# Altium PCB pump_oil_pcb.PcbDoc
Units mil, origin at the board's own origin, x right, y up, seen from the top; angles counter-clockwise.
Board outline 1771.65 x 2165.35 mil, 2 copper layers (Top Layer, Bottom Layer); 50 components, 31 nets, 191 pads, 73 vias.
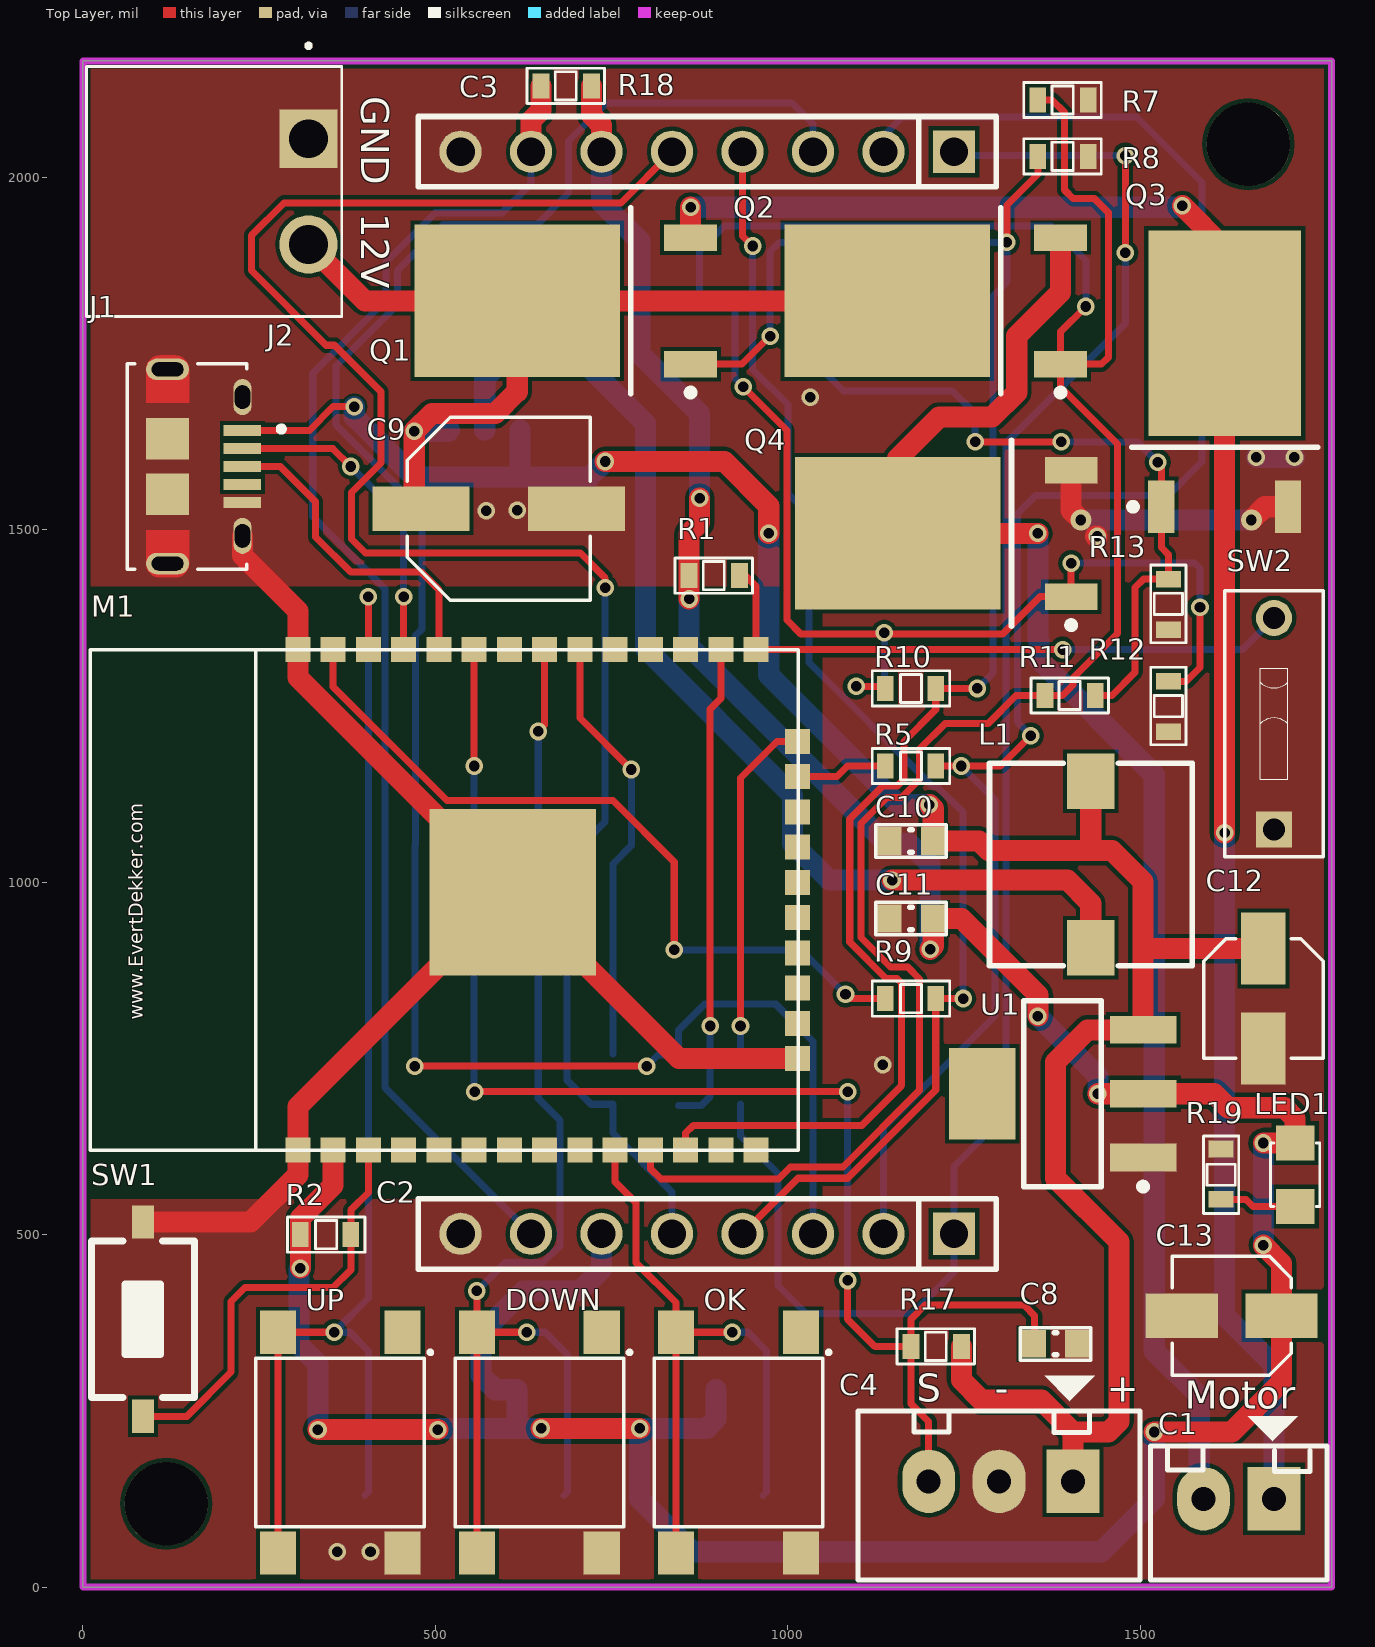
[diagram p0: Top Layer view]
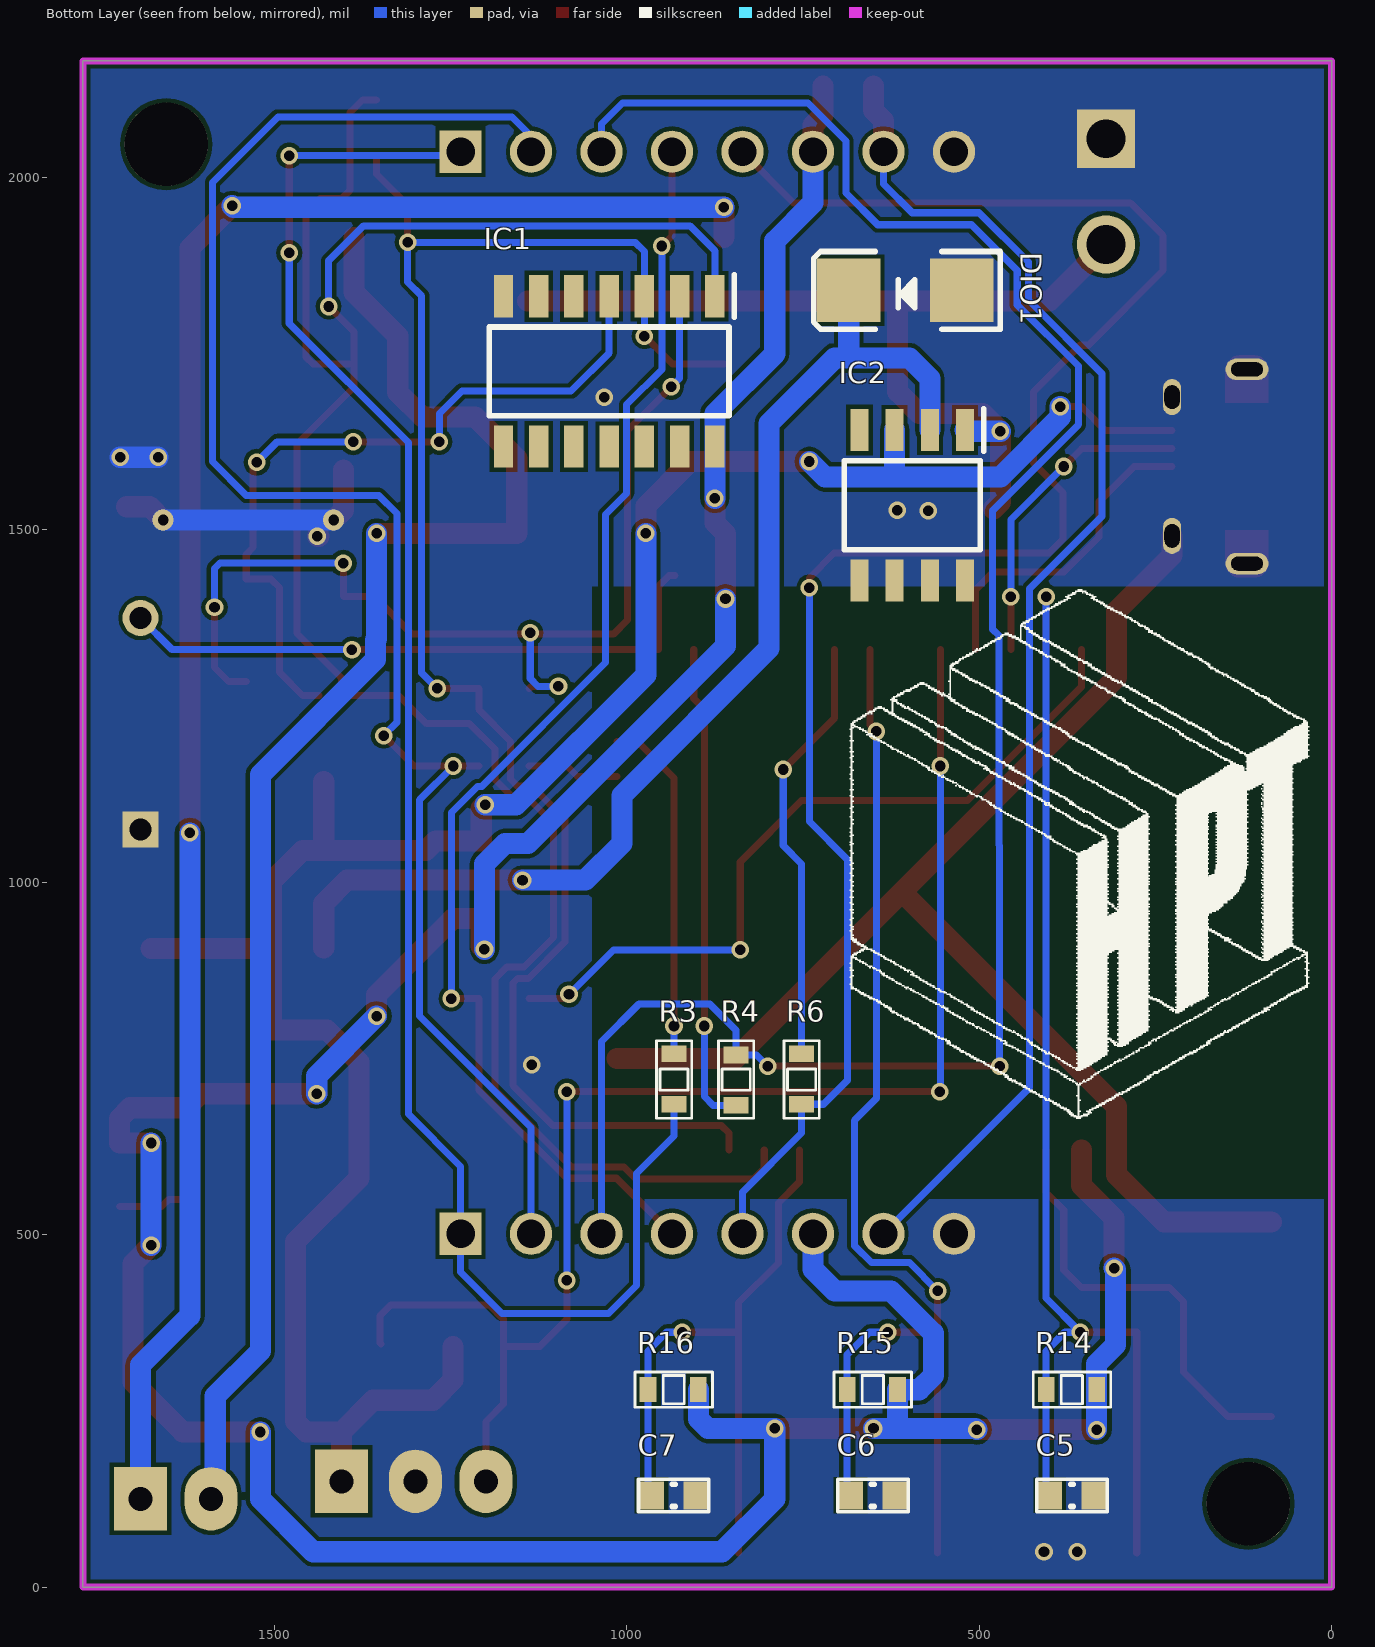
[diagram p1: Bottom Layer view, seen from below]
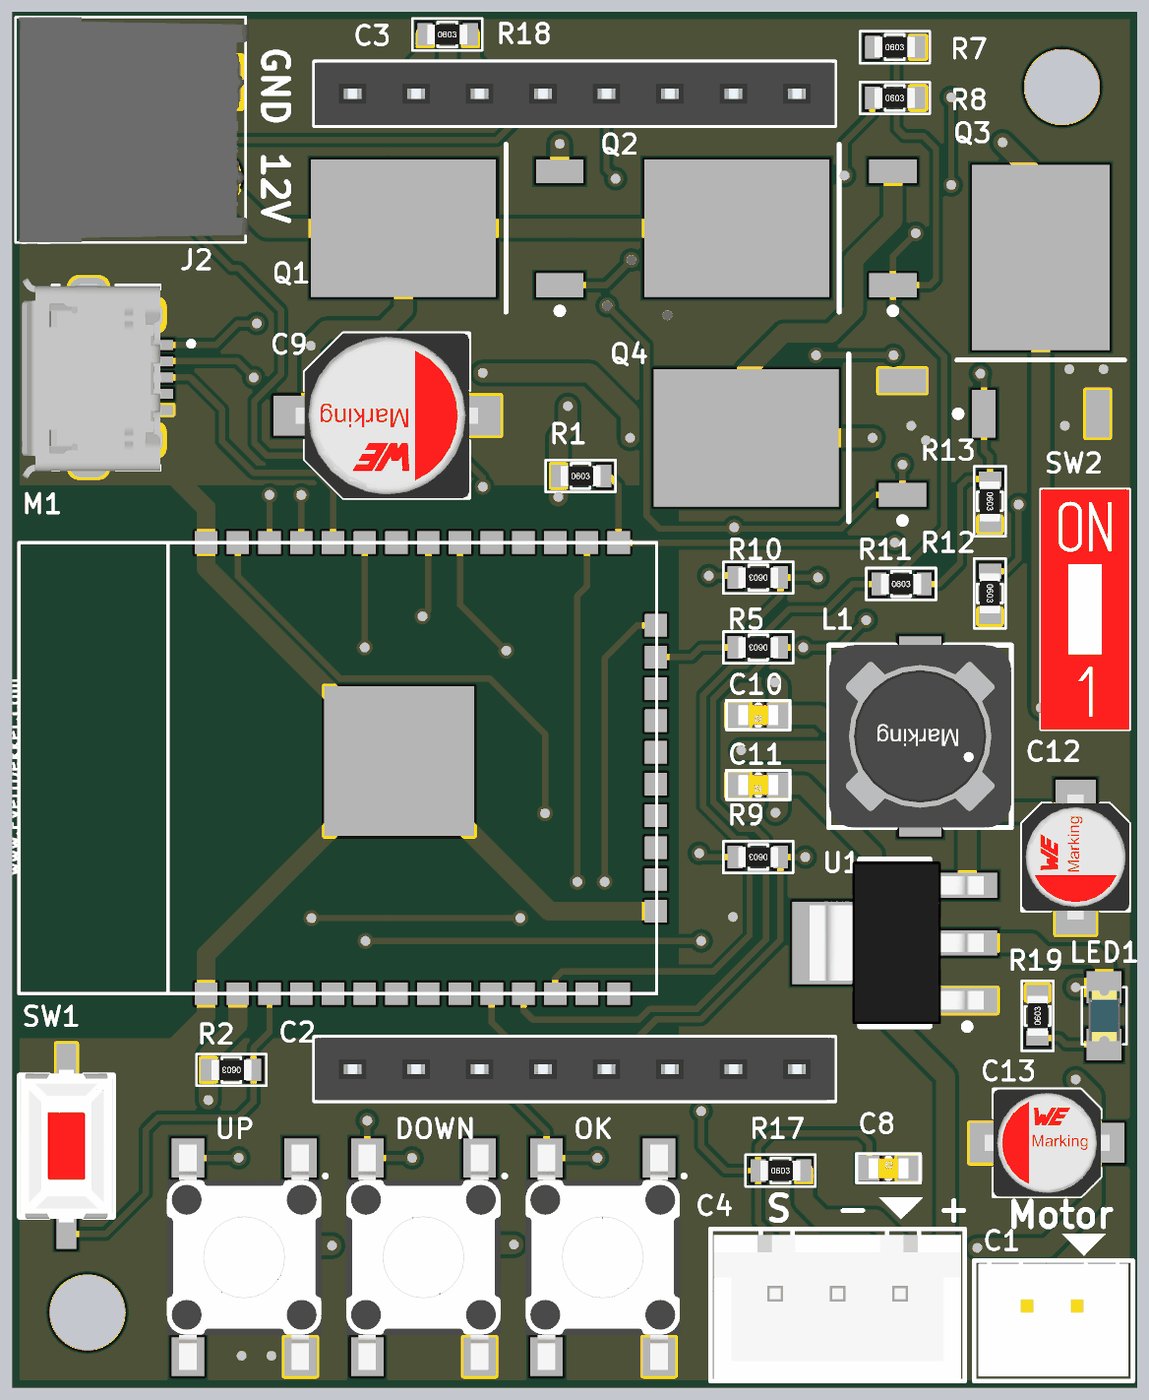
[diagram p2: 3D render of the assembled board from above, using the file's embedded part models]
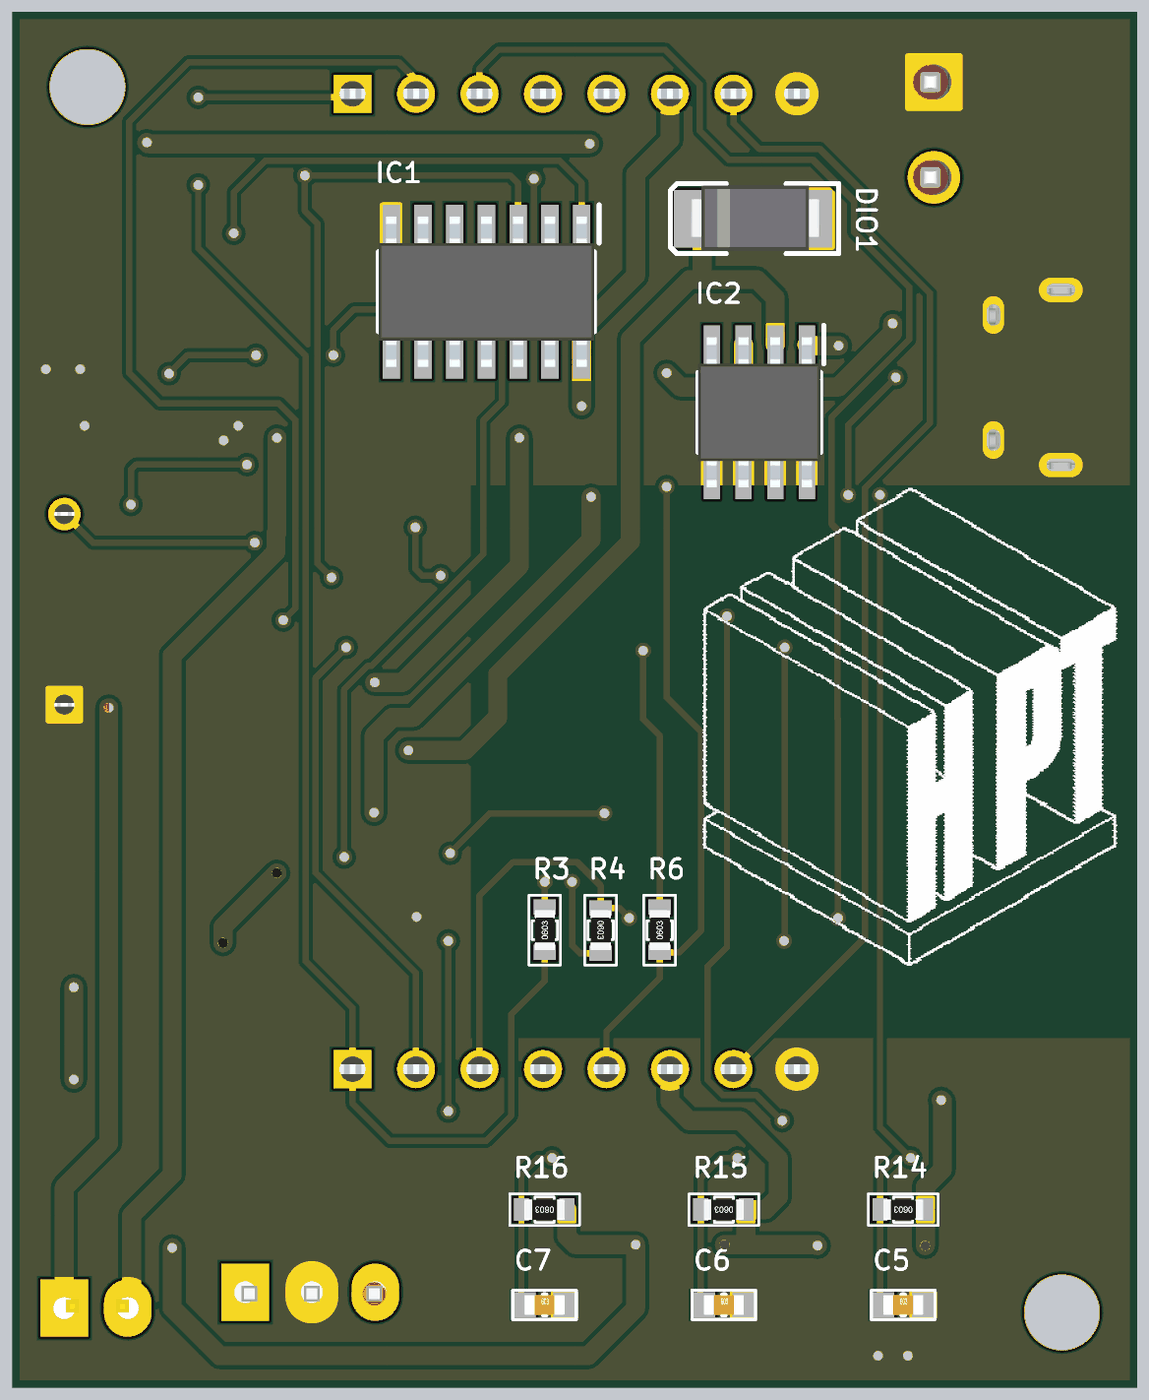
[diagram p3: 3D render of the assembled board from below, using the file's embedded part models]

## Layer stack, top to bottom
Top Solder: solder mask 0.4, Solder Resist, Dk 3.5
Top Layer: signal copper 1.4
Dielectric 1: dielectric 12.6, FR-4, Dk 4.8
Bottom Layer: signal copper 1.4
Bottom Solder: solder mask 0.4, Solder Resist, Dk 3.5

## Board outline
0,0 1771.65,0 1771.65,2165.35 0,2165.35

## Design rules (kind name [scope] priority, off if disabled: settings)
Clearance [All] p1: gap=6
PlaneConnect [All] p1: planeconnectstyle=Direct reliefexpansion=20 reliefentries=4 reliefconductorwidth=10 reliefairgap=10
PolygonConnect [All] p1: connectstyle=Direct reliefconductorwidth=10 reliefentries=4 polygonreliefangle="90 Angle" airgapwidth=10
RoomDefinition pump_oil_schematic [InComponentClass('pump_oil_schematic')] p1: confinementstyle=ConfineIn formatcopy=TRUE lockcomponents=FALSE outline 2025,30 14170,30 14170,1175 2025,1175
RoutingVias [All] p1: holewidth=15 width=25 viastyle="Through Hole" minholewidth=15 minwidth=25 maxholewidth=28 maxwidth=50
SolderMaskExpansion [All] p1: expansion=4
Width [All] p1: maxlimit=50 minlimit=10 preferedwidth=10
29 further rules are at their usual default settings.

## Components (designator, comment, footprint, x,y, rotation, side; value= is the part's Value field where it differs from the comment)
C1 "Header2" Header2 1690,125 r180 top
C2 "JP8" JP8-C1T 1235.83,501.18 r180 top locked
C3 "JP8" JP8-C1T 1235.83,2036.61 r180 top locked
C4 "Header3" Header3 1400,150 r180 top
C5 "10uF" CN-SMD-0603 368.4,130 r180 bottom
C6 "10uF" CN-SMD-0603 650.9,130 r180 bottom
C7 "10uF" CN-SMD-0603 933.4,130 r180 bottom
C8 "10uF" CN-SMD-0603 1380,345 r0 top
C9 "470uF" CAP-ALU-SMD-6.3x7.7x2.2 590,1530 r0 top
C10 "10uF" CN-SMD-0603 1175,1058.54 r180 top
C11 "10uF" CN-SMD-0603 1175,948.54 r180 top
C12 "CN-ALU-SMD" CAP-ALU-SMD-4.5x5x1.4 1675,835 r270 top
C13 "CN-ALU-SMD" CAP-ALU-SMD-4.5x5x1.4 1630,385 r180 top
DIO1 "SS34" DIO-SMD-106 605,1840 r180 bottom
DOWN "SW" SW2-SMD 647.5,205 r270 top (schematic designator SW4)
IC1 "74HC14S14-13" SOIC127P600X173-14N 1025,1725 r270 bottom
IC2 "XL1509-5.0E1" SOIC127P600X175-8N 595,1535 r270 bottom
J1 "10118194-0001LF" AMPHENOL_10118194-0001LF 120,1590 r270 top
J2 "1782572" 1782572 320,2055 r270 top
L1 "1.0 μH" L-SMD-M-7.3x4.5 1430,1025 r0 top
LED1 "LED" LED-0805-Blue 1720,630 r270 top
M1 "ESP32S_Module" ESP32S 1015,620 r90 top
OK "SW" SW2-SMD 930,205 r270 top (schematic designator SW5)
Q1 "IRFR320" TO-252AA_N 685,1825 r180 top
Q2 "IRFR320" TO-252AA_N 1210,1825 r180 top
Q3 "IRFR320" TO-252AA_N 1620,1710 r90 top
Q4 "IRFR320" TO-252AA_N 1225,1495 r180 top
R1 "10K" RES-SMD-0603 895,1435 r0 top
R2 "10K" RES-SMD-0603 345,500 r180 top
R3 "10K" RES-SMD-0603 933,720.01 r90 bottom
R4 "10K" RES-SMD-0603 845,720 r270 bottom
R5 "10K" RES-SMD-0603 1175,1165 r180 top
R6 "10K" RES-SMD-0603 752,720.01 r90 bottom
R7 "10K" RES-SMD-0603 1390,2110 r0 top
R8 "10K" RES-SMD-0603 1390,2030 r0 top
R9 "10K" RES-SMD-0603 1175,835 r180 top
R10 "DNI" RES-SMD-0603 1175,1275 r180 top
R11 "DNI" RES-SMD-0603 1400,1265 r0 top
R12 "10K" RES-SMD-0603 1540,1250 r270 top
R13 "10K" RES-SMD-0603 1540,1395 r270 top
R14 "10K" RES-SMD-0603 368.4,280 r0 bottom
R15 "10K" RES-SMD-0603 650.9,280 r0 bottom
R16 "10K" RES-SMD-0603 933.4,280 r0 bottom
R17 "10K" RES-SMD-0603 1210,341.46 r0 top
R18 "10K" RES-SMD-0603 685,2130 r0 top
R19 "1K" RES-SMD-0603 1615,585 r90 top
SW1 "Reset" SW1-SMD 85,380 r90 top
SW2 "Flash" SW-DIP1-1 1690,1225 r0 top
U1 "LM1117-3.3V" SOT223 1390,700 r90 top
UP "SW" SW2-SMD 365,205 r270 top (schematic designator SW3)

## Footprints (in the part's own frame and the unit in brackets; to place one, negate y for a bottom-side part, rotate by r counter-clockwise, add the part's x,y. Pads: shape width x height; smd on the part's side, far side on the other; paste and mask are expansions set on the pad)
1782572 [mm]
  rect 2.1x2.1 hole 1.4: 1(0,0)
  round 2.1 hole 1.4: 2(3.81,0)
  silkscreen extent -3.4,-8 6.41,1.2, body extent -2.6,-7.86 6.41,1.34, height 6.9
AMPHENOL_10118194-0001LF [mm]
  rect 0.4x1.35 smd: 1(-1.3,2.7) 2(-0.65,2.7) 3(0,2.7) 4(0.65,2.7) 5(1.3,2.7)
  oval 1.3x0.65 hole 0.55 slot 0.85 at 0 deg: S1(-2.5,2.7) S2(2.5,2.7)
  oval 0.775x1.55 hole 0.5 slot 1.15 at 90 deg: S3(-3.5,0) S6(3.5,0)
  rect 1.5x1.55 smd: S4(-1,0) S5(1,0)
  Top Layer region: 193 vertices and 0 holes, not listed, extent -4,-0.775 -2.3,0.78
  Top Layer region: 193 vertices and 0 holes, not listed, extent 2.3,-0.78 4,0.775
  silkscreen extent -3.7,-1.45 3.7,4.2, body extent -3.99,-2.67 4.06,2.91, height 3.12
CAP-ALU-SMD-4.5x5x1.4 [mm]
  rect 2.6x1.6 smd: 1(-1.8,0) 2(1.8,0)
  silkscreen extent -2.15,-2.15 2.15,2.15, body extent -2.5,-2.15 2.5,2.15, height 5.45
CAP-ALU-SMD-6.3x7.7x2.2 [mm]
  rect 3.5x1.6 smd: 1(-2.8,0) 2(2.8,0)
  silkscreen extent -3.3,-3.3 3.3,3.3, body extent -3.65,-3.3 3.65,3.3, height 7.65
CN-SMD-0603 [mm]
  rect 0.9x1 smd: 1(-0.8,0) 2(0.8,0)
  silkscreen extent -1.27,-0.58 1.27,0.58, body extent -0.8,-0.4 0.8,0.4, height 0.3
DIO-SMD-106 [mil]
  rect 90x90.55 smd: 1(80,0) 2(-80,0)
  silkscreen extent -130,-55 135,55, body extent -99,-50 106,52, height 95
ESP32S [mm] "ESP32S-Module"
  rect 0.9x0.9 smd: 1(0,18.034) 2(0,16.764) 3(0,15.494) 4(0,14.224) 5(0,12.954) 6(0,11.684) 7(0,10.414) 8(0,9.144) 9(0,7.874) 10(0,6.604) 11(0,5.334) 12(0,4.064) 13(0,2.794) 14(0,1.524) 15(3.3,0.034) 16(4.57,0.034) 17(5.84,0.034) 18(7.11,0.034) 19(8.38,0.034) 20(9.65,0.034) 21(10.92,0.034) 22(12.19,0.034) 23(13.46,0.034) 24(14.73,0.034) 25(18.034,1.524) 26(18.034,2.794) 27(18.034,4.064) 28(18.034,5.334) 29(18.034,6.604) 30(18.034,7.874) 31(18.034,9.144) 32(18.034,10.414) 33(18.034,11.684) 34(18.034,12.954) 35(18.034,14.224) 36(18.034,15.494) 37(18.034,16.764) 38(18.034,18.034)
  rect 6x6 smd: 101(9.3,10.3)
  silkscreen extent 0,0 18.03,25.53, body extent 0,0 18.03,25.53, height 2
Header2 [mil] "CON2"
  rect 75x90 hole 34: 1(0,0)
  oval 75x90 hole 34: 2(100,0)
  silkscreen extent -75,-118 175,115, body extent -68,-70 168,107, height 236
Header3 [mil] "CON 3"
  rect 75x90 hole 34: 1(-5,0)
  oval 75x90 hole 34: 2(100,0) 3(200,0)
  silkscreen extent -100,-150 300,140, body extent -95,-90 295,136, height 276
JP8-C1T [mm] "8 row, straight, gold plating"
  rect 1.52x1.52 hole 1.02: 1(0,0)
  round 1.52 hole 1.02: 2(2.54,0) 3(5.08,0) 4(7.62,0) 5(10.16,0) 6(12.7,0) 7(15.24,0) 8(17.78,0)
  silkscreen extent -1.52,-1.27 19.3,1.27, body extent -1.52,-1.25 19.3,1.25, height 8.51
L-SMD-M-7.3x4.5 [mm] "WE-PDA SMD Shielded Power Inductor, 7345"
  rect 1.7x2 smd: 1(0,3) 2(0,-3)
  silkscreen extent -3.65,-3.65 3.65,3.65, body extent -3.65,-3.65 3.65,3.65, height 4.05
LED-0805-Blue [mil]
  rect 50x55 smd: 1(0,0) 2(90,0)
  silkscreen extent 0,-35 90,35, body extent 5,-25 85,25, height 43
RES-SMD-0603 [mm]
  rect 0.6x0.9 smd: 1(-0.889,0) 2(0.927,0)
  silkscreen extent -1.4,-0.64 1.4,0.64, body extent -0.8,-0.4 0.8,0.4, height 0.43
SOIC127P600X173-14N [mm]
  rect 1.528x0.7 smd: 1(-2.711,3.81) 2(-2.711,2.54) 3(-2.711,1.27) 4(-2.711,0) 5(-2.711,-1.27) 6(-2.711,-2.54) 7(-2.711,-3.81) 8(2.711,-3.81) 9(2.711,-2.54) 10(2.711,-1.27) 11(2.711,0) 12(2.711,1.27) 13(2.711,2.54) 14(2.711,3.81)
  silkscreen extent -3.47,-4.32 1.6,4.51, body extent -3,-4.32 3,4.32, height 1.73
SOIC127P600X175-8N [mm]
  rect 1.525x0.65 smd: 1(-2.712,1.905) 2(-2.712,0.635) 3(-2.712,-0.635) 4(-2.712,-1.905) 5(2.712,-1.905) 6(2.712,-0.635) 7(2.712,0.635) 8(2.712,1.905)
  silkscreen extent -3.47,-2.45 1.6,2.58, body extent -3,-2.45 3,2.45, height 1.75
SOT223 [mm]
  rect 1x2.4 smd: 1(-2.3,-2.9) 2(0,-2.9) 3(2.3,-2.9)
  rect 3.3x2.4 smd: 4(0,2.9)
  silkscreen extent -3.47,-3.03 3.35,1.4, body extent -3.25,-3.56 3.25,3.4, height 1.68
SW1-SMD [mm]
  rect 1.2x0.8 smd: 1(-3.5,0) 2(3.5,0)
  silkscreen extent -2.82,-1.85 2.82,1.85, body extent -3.05,-1.85 3.05,1.85, height 2.5
SW2-SMD [mm] "6*6mm vertical type, SMD, height 5.0mm, black actuator, 160gf, T&R"
  rect 1.55x1.3 smd: 1(-3.975,2.25) 2(-3.975,-2.25) 3(3.975,-2.25) 4(3.975,2.25)
  silkscreen extent -3.29,-3.04 3.04,3.29, body extent -4.5,-3.1 4.5,3.1, height 4.99
SW-DIP1-1 [mm] "01p, 2.54mm Pitch, Horizontal, Box Type, THT, flat Actuator, red, without Tape, Tube"
  rect 1.3x1.3 hole 0.8: 1(0,-3.81)
  round 1.3 hole 0.8: 2(0,3.81)
  silkscreen extent -1.77,-4.8 1.77,4.8, body extent -1.77,-4.8 1.77,4.8, height 5.4
TO-252AA_N [mm] "D-PAK, 4-Leads, Body 6.1x6.5mm, Pitch 2.28mm, Lead Span 9.9mm, IPC Medium Density"
  rect 1.9x0.95 smd: 1(-4.5,2.28) 3(-4.5,-2.28)
  rect 7.4x5.5 smd: 4(1.75,0)
  silkscreen extent -4.62,-3.35 -2.35,3.43, body extent -2.25,-3.37 4.1,3.37, height 2.38

## Part data
C1: "Header IDC, 2 x 1 Pin Vertical 2.54mm Pitch (Non-Boxed, Male)"
C2 C3: "WR-PHD 2.54 mm Angled Socket Header"
C4: "Header IDC, 3 x 1 Pin Vertical 2.54mm Pitch (Non-Boxed, Male)"
C5 C6 C7 C8 C10 C11: library part CN, "Tu gom"
C9: library part CN-ALU-SMD, "Polarized Capacitor (Axial)"
C12 C13: "Polarized Capacitor (Axial)"
DIO1: library part "Diode SMD", "Default Diode"
DOWN OK UP: library part SW4, "Switch button 4 pin"
IC1 IC2: "Integrated Circuit"
J1: "USB - micro B USB 2.0 Receptacle Connector 5 Position Surface Mount, Right Angle; Through Hole"
J2: "Connector"
L1: library part L-SMD-1
LED1: library part "LED SMD"
M1: "Esp-32S"
Q1 Q2 Q3 Q4: "HEXFET Power MOSFET"
R1 R2 R3 R4 R5 R6 R7 R8 R9 R10 R11 R12 R13 R14 R15 R16 R17 R18 R19: library part Res-SMD, "Resistor"
SW1 SW2: library part SW2, "Switch button 2 pin"
U1: library part LM1117, "800mA Low-Dropout Linear Regulator"

## Free pads (board coordinates)
  round 118.11 hole 118.11: 0(118.11,118.11) 0(1653.54,2047.24)

## Via types
v1: diameter 25, hole 15, Top Layer to Bottom Layer, tented both sides, 71 vias
v2: diameter 30, hole 15, Top Layer to Bottom Layer, tented both sides, 2 vias

## Nets (pads, with @x,y where several pads share a name; then routed paths per layer and width w, separated by ;. In a path a pad name is that pad's centre, name@x,y a point inside that pad or via, vN(x,y) a via of type N, cw(c..) or ccw(c..) an arc to the next point about the centre after c; other vN are vias at no path point)
3V3: C2.6 C3.6 C11.1 C13.1 IC1.14 LED1.1 M1.2 R1.1 R2.2 R14.1 R15.1 R16.1 R18.2 U1.2 | length 5265.6
  Top Layer w30: v1(308.51,452.49) R2.2 308.51,523.51 355,570 M1.2 ; v1(333.4,223.4) v1(503.4,223.4) ; v1(650,225) v1(790,225) ; R18.2 721.49,2088.51 735.83,2074.17 C3.6 ; v1(860,1402) R1.1 860,1495 875,1510 v1(875,1545) ; v1(1202,905) 1206.5,909.5 C11.1 1246.46,948.54 1355,840 v1(1355,810) ; v1(1440,700) U1.2 1605,700 1625,680 1705,680 1720,665 LED1.1 v1(1675,630) ; v1(1520,220) 1630,220 1700.87,290.87 C13.1 1700.87,459.13 v1(1675,485)
  Bottom Layer w30: v1(308.51,452.49) 306.5,450.48 306.5,343.5 333.4,316.6 R14.1 v1(333.4,223.4) ; v1(503.4,223.4) 505,225 615,225 ; v1(650,225) 615,225 ; C2.6 735.83,450.83 705,420 625,420 565,360 565,300 585,280 R15.1 615.9,225.9 615,225 ; C3.6 735.83,1964.17 790,1910 790,1750 875,1665 IC1.14 v1(875,1545) ; v1(860,1402) 860,1335 1140,1055 1173,1055 1202,1026 v1(1202,905) ; R16.1 898.4,238.4 885,225 v1(790,225) 790,125 865,50 1445,50 1520,125 v1(1520,220) ; v1(1355,810) 1440,725 v1(1440,700) ; v1(1675,485) v1(1675,630)
5V: C4.1 C10.1 C12.1 IC2.3 J1.1 L1.1 R17.2 U1.3 | length 3380.4
  Top Layer w10: J1.1 321.18,1641.18 355,1675 v1(385,1675)
  Top Layer w30: v1(741,1597) 910,1597 973,1534 v1(973,1495) ; v1(1201,1110) 1206.5,1104.5 C10.1 1271.46,1058.54 1285,1045 1430,1045 ; R17.2 1246.49,293.51 1275,265 1360,265 1405,220 ; C4.1 1405,220 ; L1.1 1430,1045 ; C12.1 1505.04,905.87 1504.17,905 ; 1405,220 1455,220 1470,235 1470,490 1380,580 1380,745 1425.55,790.55 U1.3 1504.17,905 ; 1430,1045 1460,1045 1504.17,1000.83 1504.17,905
  Bottom Layer w30: v1(385,1675) 385,1660 470,1575 620,1575 ; IC2.3 620,1575 ; v1(741,1597) 719,1575 620,1575 ; v1(973,1495) 973,1294 1157,1110 v1(1201,1110)
12V: C9.1 IC2.1 J2.2 Q1.4 Q2.4 | length 1317.3
  Top Layer w30: J2.2 400,1825 Q1.4 ; C9.1 470,1539.76 v1(470,1640) 495,1665 585,1665 616.1,1696.1 Q1.4 ; Q2.4 Q1.4
  Bottom Layer w30: v1(470,1640) 518.23,1640 IC2.1
BTN_DOWN: C6.1 DOWN.2 DOWN.3 M1.31 R15.2 | length 1721.6
  Top Layer w10: DOWN.3 DOWN.2 ; v1(558.92,420.08) DOWN.2 ; v1(629.5,361.5) DOWN.2 ; v1(646,1214) 655,1223 M1.31
  Bottom Layer w10: v1(558.92,420.08) 599.09,460.26 652.78,460.26 676.75,484.23 676.75,662.25 646,693 v1(646,1214) ; v1(629.5,361.5) 655.5,361.5 687.39,329.61 R15.2 687.39,135 C6.1
BTN_OK: C7.1 M1.10 OK.2 OK.3 R16.2 | length 953.9
  Top Layer w10: M1.10 755,575 785,545 785,460 841.42,403.58 OK.2 ; OK.3 OK.2 ; v1(921.5,361.5) OK.2
  Bottom Layer w10: v1(921.5,361.5) 943.5,361.5 969.89,335.11 R16.2 969.89,135 C7.1
BTN_UP: C5.1 M1.36 R14.2 UP.2 UP.3 | length 1798.2
  Top Layer w10: UP.3 UP.2 v1(356.5,361.5) ; M1.36 v1(405,1405)
  Bottom Layer w10: C5.1 404.89,135 R14.2 404.89,335.11 378.5,361.5 v1(356.5,361.5) 405,410 v1(405,1405)
CE: C2.2 C3.2 R5.1 | length 2437.7
  Top Layer w10: R5.1 v1(1246,1165) 1302,1165 v1(1345,1208)
  Bottom Layer w10: C2.2 1135.83,651.83 1294,810 1294,1117 v1(1246,1165) ; C3.2 1135.83,2058.83 1163,2086 1495,2086 1588,1993 1588,1597 1540,1549 1352,1549 1326,1523 1326,1227 v1(1345,1208)
CLK: C2.5 C3.5 R6.1 | length 2593.4
  Top Layer w10: v1(741,1418) 741,1432 706,1467 401,1467 381,1487 381,1553 423,1595 423,1696 357,1762 345,1762 239,1868 239,1918 285,1964 763.22,1964 C3.5
  Bottom Layer w10: v1(741,1418) 741,1086 687,1032 687,719 721,685 R6.1 752,644 835.83,560.17 C2.5
DC: C2.3 C3.3 R4.1 | length 2920
  Top Layer w10: v1(471,739) v1(800,739)
  Bottom Layer w10: v1(471,739) 471,1052 472,1053 472,1350 481,1359 481,1527.23 359,1649.23 359,1732.37 446,1819.37 446,1868 511,1933 644,1933 689,1978 689,2052 743,2106 1006,2106 1035.83,2076.17 C3.3 ; v1(800,739) 816,755 R4.1 845,790 882,827 983,827 1035.83,774.17 C2.3
DIN: C2.4 C3.4 R9.1 | length 1862.4
  Top Layer w10: C2.4 1014.65,580 1085,580 1210,705 R9.1 v1(1249,835) ; C3.4 935.83,1917.17 v1(950.22,1902.78)
  Bottom Layer w10: v1(950.22,1902.78) 950.22,1727.78 1000.22,1677.78 1000.22,1551.78 1030,1522 1030,1311.77 1205.77,1136 1211.77,1136 1249,1098.77 v1(1249,835)
GND: C2.8 C3.8 C4.2 C5.2 C6.2 C7.2 C8.2 C9.2 C10.2 C11.2 C12.2 C13.2 DIO1.1 DOWN.4 IC1.7 IC2.5 IC2.6 IC2.7 IC2.8 J1.5 J1.S1 J1.S2 J1.S3 J1.S4 J1.S5 J1.S6 J2.1 M1.1 M1.15 M1.38 M1.101 OK.4 Q3.3 Q4.3 R7.2 R8.2 R12.2 R13.2 R19.2 SW1.2 SW2.1 U1.1 UP.4 | length 2375.3
  Top Layer w30: SW1.2 237.8,517.8 305,585 M1.1 305,681.65 M1.101 ; J1.S2 226.3,1463.7 305,1385 M1.38 305,1290.63 M1.101 ; M1.15 845.71,749.92 M1.101 ; Q4.3 1402.17,1527.83 v2(1416,1514) ; v1@1437,1491 v1(1439,1491) ; v2(1658,1514) 1676.83,1532.83 Q3.3
  Bottom Layer w30: v2(1416,1514) v2(1658,1514) ; v1(1665,1603) v1(1719,1603)
  other v1: 361,50 408,50 1135,741 572,1527 616,1528 1032,1688
L1_MOTOR: IC1.1 M1.11 Q2.1 R7.1 R11.1 | length 3133
  Top Layer w10: M1.11 805,594 820,579 987,579 1004,596 1078.37,596 1187.19,704.82 1187.19,862.81 1170.29,879.71 1145.92,879.71 1104,921.63 1104,1083.37 1140.91,1120.28 1161.5,1120.28 1187.19,1145.96 1187.19,1189.08 1223.11,1225 1284,1225 1324,1265 R11.1 1390,1265 1405,1280 1405,1290 1468,1353 1468,1622 1387.17,1702.83 Q2.1 ; R7.1 1375,2110 1393,2092 1393,1982 1405,1970 1435,1970 1455,1950 1455,1745 1445.24,1735.24 Q2.1 ; v1(1423,1817) 1387.17,1781.17 Q2.1
  Bottom Layer w10: IC1.1 875,1896 910.5,1931.5 1373.5,1931.5 1423,1882 v1(1423,1817)
L2_MOTOR: IC1.3 M1.12 Q1.1 R8.1 R10.1 | length 2464.3
  Top Layer w10: M1.12 855,644 866,655 1105,655 1161.32,711.32 1161.32,857.27 1154.88,863.71 1139.29,863.71 1088,915 1088,1090 1134.28,1136.28 1154.88,1136.28 1165,1146.4 1165,1200 1210,1245 R10.1 v1(1269,1275) ; Q1.1 935.24,1735.24 v1(975,1775) ; v1(1311,1908) 1311,1961 1355,2005 R8.1
  Bottom Layer w10: v1(975,1775) IC1.3 975,1895 988,1908 v1(1311,1908) 1311,1852 1291,1832 1291,1297 v1(1269,1275)
L11_MOTOR: IC1.2 Q4.1 R10.2 R12.1 | length 1503.2
  Top Layer w10: v1(937,1703) 999,1641 999,1372 1019,1352 1305,1352 1358.24,1405.24 Q4.1 v1(1402.17,1452.83) ; v1(1097,1278) 1135.5,1278 R10.2 ; R12.1 1565,1285 1585,1305 v1(1585,1390)
  Bottom Layer w10: IC1.2 925,1715 v1(937,1703) ; v1(1097,1278) 1126,1278 1137,1289 v1(1137,1354) ; v1(1402.17,1452.83) 1577.17,1452.83 1585,1445 v1(1585,1390)
L22_MOTOR: IC1.4 Q3.1 R11.2 R13.1 | length 1082.7
  Top Layer w10: v1(1266,1625) v1(1388,1625) ; R11.2 1460,1265 1493,1298 1493,1418 1505,1430 R13.1 1540,1465 1530.24,1474.76 Q3.1 1530.24,1590.76 v1(1525,1596)
  Bottom Layer w10: IC1.4 1025,1751 1079,1697 1234,1697 1266,1665 v1(1266,1625) ; v1(1388,1625) 1496,1625 v1(1525,1596)
LED+: C2.7 C3.7 R18.1 | length 1947
  Top Layer w30: C3.7 635.83,2080.83 650,2095 R18.1
  Bottom Layer w10: C2.7 428.5,708.51 428.5,1416.5 326,1519 326,1722 430,1826 430,1880 500,1950 595,1950 635.83,1990.83 C3.7
NetC1_1: C1.1 Q1.3 Q3.4 | length 2630.7
  Top Layer w30: Q1.3 v1(862.17,1957.83) ; v1(1560,1960) 1620,1900 Q3.4 v1(1620,1070)
  Bottom Layer w30: v1(862.17,1957.83) 1557.83,1957.83 v1(1560,1960) ; v1(1620,1070) 1620,385 1690,315 C1.1
NetC1_2: C1.2 Q2.3 Q4.4 | length 2225.6
  Top Layer w30: v1(1355,1495) Q4.4 1156.1,1601.1 1215,1660 1290,1660 1325,1695 1325,1775 1387.17,1837.17 Q2.3
  Bottom Layer w30: v1(1355,1495) 1355,1345.38 1356.5,1343.88 1356.5,1316.12 1520,1152.62 1520,335 1584,271 1584,131 C1.2
NetDIO1_2: DIO1.2 IC2.2 L1.2 | length 1651.7
  Top Layer w30: v1(1148,1003) 1397,1003 1430,970 L1.2
  Bottom Layer w30: IC2.2 570,1715 599,1744 685,1744 ; DIO1.2 685,1744 ; v1(1148,1003) 1059,1003 1007,1055 1007,1123 798,1332 798,1651 705,1744 685,1744
NetLED1_2: LED1.2 R19.1 | length 109.1
  Top Layer w10: R19.1 1650,550 1660,540 LED1.2
NetM1_3: M1.3 R2.1 SW1.1 | length 620
  Top Layer w10: SW1.1 147.2,242.2 210,305 210,405 230,425 355,425 380,450 R2.1 380,535 405,560 M1.3
NetM1_23: M1.23 R5.2 | length 131.1
  Top Layer w10: M1.23 1069.92,1149.92 1085,1165 R5.2
NetM1_24: M1.24 R3.2 | length 493.7
  Top Layer w10: v1(933,796) 933,1148 984.92,1199.92 M1.24
  Bottom Layer w10: R3.2 v1(933,796)
NetM1_25: M1.25 R1.2 SW2.2 | length 873.4
  Top Layer w10: R1.2 940,1435 955,1420 M1.25 v1(1390,1330)
  Bottom Layer w10: v1(1390,1330) 1645,1330 SW2.2
NetM1_26: M1.26 R4.2 | length 690.4
  Top Layer w10: v1(890,796) 890,1246 905,1261 M1.26
  Bottom Layer w10: R4.2 877.51,683.51 890,696 v1(890,796)
NetM1_30: M1.30 R6.2 | length 614.5
  Top Layer w10: M1.30 705,1233 v1(778,1160)
  Bottom Layer w10: R6.2 752,1026 778,1052 v1(778,1160)
NetM1_37: M1.37 R9.2 | length 1092.6
  Top Layer w10: M1.37 355,1277.4 516.4,1116 752,1116 839,1029 v1(839,904) ; v1(1082,841) 1088,835 R9.2
  Bottom Layer w10: v1(839,904) 1019,904 v1(1082,841)
RST: C2.1 C3.1 R3.1 | length 2500.1
  Top Layer w10: v1(1479,1893) v1(1479,2031)
  Bottom Layer w10: R3.1 933,640 986,587 986,428 1026,388 1177,388 1235.83,446.83 C2.1 1235.83,596.83 1310,671 1310,1624 1479,1793 v1(1479,1893) ; C3.1 1241.45,2031 v1(1479,2031)
RX_1: J1.2 M1.35 | length 455.7
  Top Layer w10: J1.2 355,1615.59 355,1615 v1(380,1590) ; M1.35 v1(455,1405)
  Bottom Layer w10: v1(380,1590) 455,1515 v1(455,1405)
SENSOR: C4.3 C8.1 M1.33 R17.1 | length 2055.9
  Top Layer w10: v1(555,1165) M1.33 ; v1(556,703) v1(1085,703) ; v1(1085,435) 1085,380 1123.54,341.46 R17.1 ; C4.3 1200,235 1175,260 R17.1 ; C8.1 1350,346.5 1350,385 1335,400 1195,400 1175,380 R17.1
  Bottom Layer w10: v1(555,1165) 555,704 v1(556,703) ; v1(1085,435) v1(1085,703)
TX_1: J1.3 M1.34 | length 465.5
  Top Layer w10: J1.3 280,1590 330,1540 330,1490 380,1440 480,1440 505,1415 M1.34
pads on no net: DOWN.1 IC1.5 IC1.6 IC1.8 IC1.9 IC1.10 IC1.11 IC1.12 IC1.13 IC2.4 J1.4 M1.4 M1.5 M1.6 M1.7 M1.8 M1.9 M1.13 M1.14 M1.16 M1.17 M1.18 M1.19 M1.20 M1.21 M1.22 M1.27 M1.28 M1.29 M1.32 OK.1 U1.4 UP.1

## Polygon pours and split planes (outlines as drawn)
GND on Bottom Layer "Top Layer-No Net" (solid, pour order 0): 0,2165.35 0,1420 1050,1420 1050,550 0,550 0,0 1771.65,0 1771.65,2165.35
GND on Top Layer "Top Layer-No Net" (solid, pour order 2): 0,2165.35 0,1420 1050,1420 1050,550 0,550 0,0 1771.65,0 1771.65,2165.35

## Keep-outs
Keep-Out Layer:
  the board outline again, w10

## Silkscreen, mask and mechanical layers (free items; w line width, h text height)
Top Overlay:
  text "GND" at 395,2115 h40 r270
  text "12V" at 395,1949 h40 r270
  text "S" at 1183,263 h40
  text "-" at 1294,263 h40
  text "+" at 1453,263 h40
  text "Motor" at 1563,253 h40
Bottom Overlay:
  drawing of 2330 lines, arcs and shapes, not listed

## Text inside footprints (layer, text, board x,y; h text height)
J1: Mechanical 13 "PCB END" at 37.32,1666.77 h19.68 r270
M1: Top Overlay "www.EvertDekker.com" at 85,805 h19.68 r90